# Altium PCB XBee_module.PcbDoc
Units mm, origin at the board's own origin, x right, y up, seen from the top; angles counter-clockwise.
Board outline 38.5 x 46 mm, 4 copper layers (Component Side, GND, Power plane, Solder Side), stack 1.426 mm thick; 11 components, 20 nets, 80 pads, 26 vias.
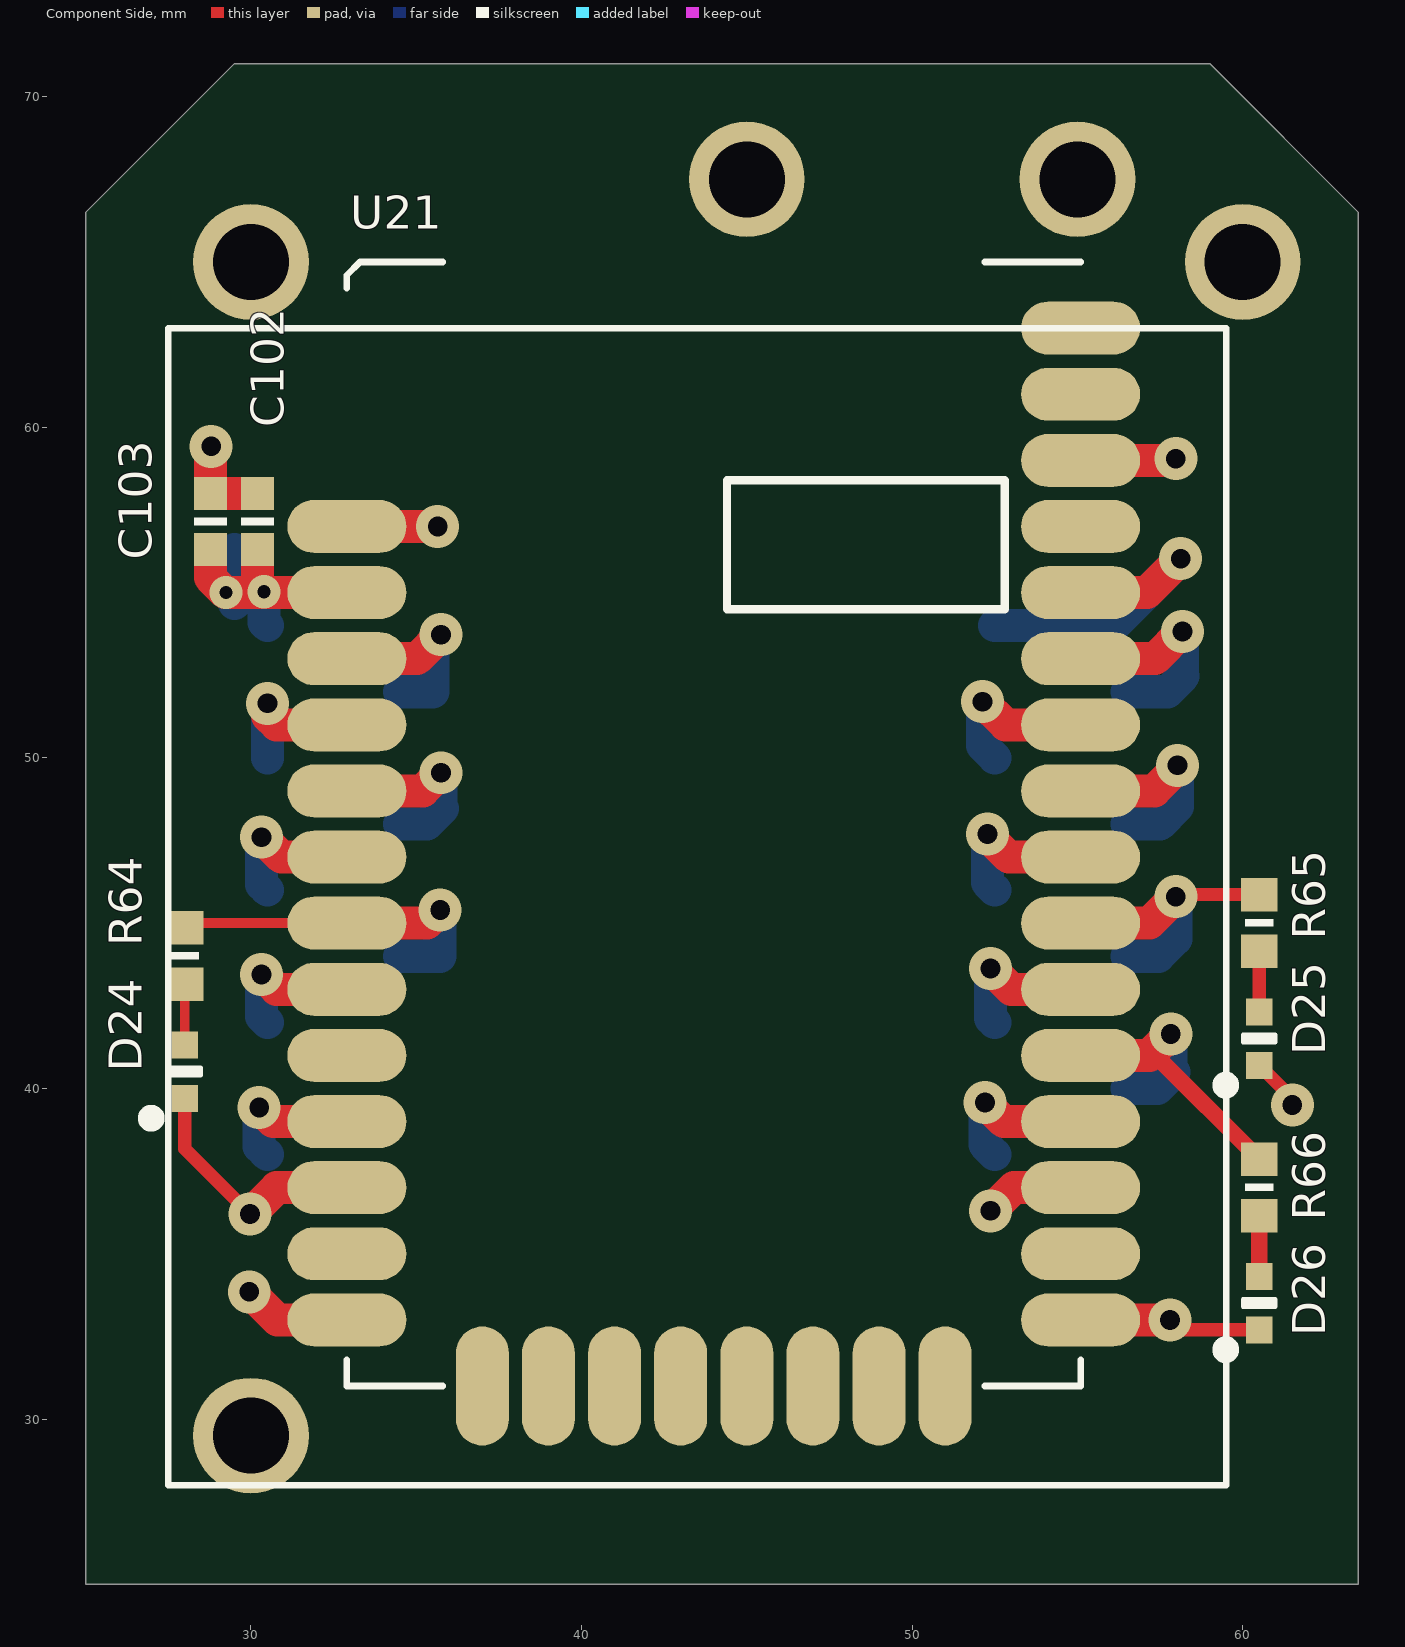
[diagram p0: Component Side view]
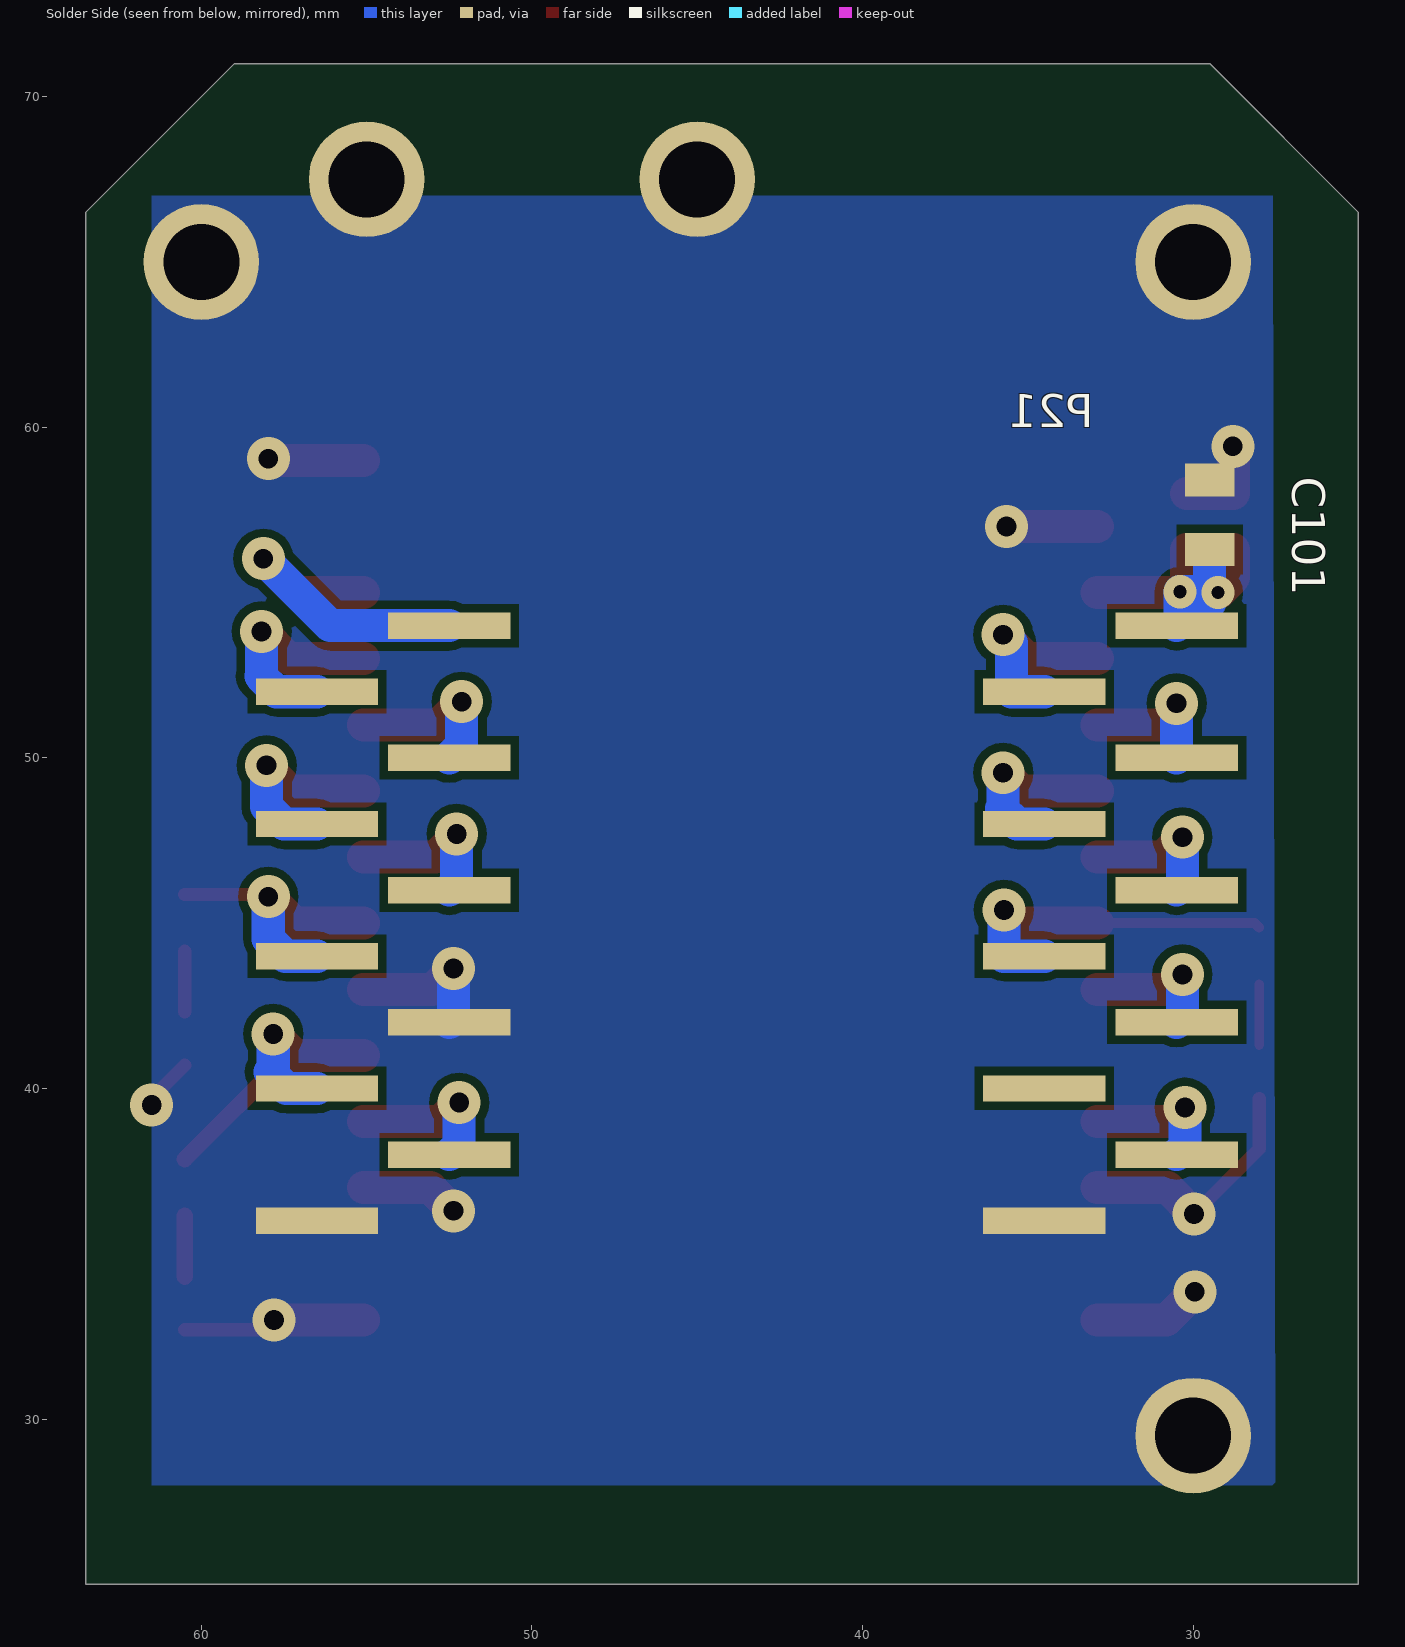
[diagram p1: Solder Side view, seen from below]

## Layer stack, top to bottom
Top Solder: solder mask 0.01, Solder Resist, Dk 3.5
Component Side: signal copper 0.035
Dielectric 1: prepreg 0.288, FR-4, Dk 4.5
GND: signal copper 0.035
Dielectric 4: core 0.71, FR-4, Dk 4.5
Power plane: signal copper 0.035
Dielectric 3: prepreg 0.288, FR-4, Dk 4.5
Solder Side: signal copper 0.035
Bottom Solder: solder mask 0.01, Solder Resist, Dk 3.5

## Board outline
25,25 63.5,25 63.5,66.5 59,71 29.5,71 25,66.5

## Design rules (kind name [scope] priority, off if disabled: settings)
Clearance [All] p1: gap=0.25
HoleSize [All] p1: absolutevalues=TRUE maxlimit=2.54 minlimit=0.3 maxpercent=80.000 minpercent=20.000
MinimumAnnularRing [All] p1: minimumring=0.3
PlaneConnect [All] p1: planeconnectstyle=Direct reliefexpansion=0.508 reliefentries=4 reliefconductorwidth=0.254 reliefairgap=0.254
PolygonConnect [All] p1: connectstyle=Direct reliefconductorwidth=0.254 reliefentries=4 polygonreliefangle="90 Angle" airgapwidth=0.254
RoutingVias [All] p1: holewidth=0.5 width=1 viastyle="Through Hole" minholewidth=0.3 minwidth=0.7 maxholewidth=0.711 maxwidth=1.27
SolderMaskExpansion [All] p1: expansion=0.102
Width [All] p1: maxlimit=10 minlimit=0.25 preferedwidth=1
28 further rules are at their usual default settings.

## Components (designator, comment, footprint, x,y, rotation, side; value= is the part's Value field where it differs from the comment)
C101 "10uF" CAP0805W 29.5,57.35 r270 bottom
C102 "220nF" CAP0603R 30.2,57.15 r270 top
C103 "47pF" CAP0603R 28.775,57.15 r270 top
D24 "LED" WL-SMCW 28,40.5 r90 top
D25 "LED" WL-SMCW 60.5,41.5 r90 top
D26 "LED" WL-SMCW 60.5,33.5 r90 top
P21 "XBee pin" "XBEE PIN" 43.5,45 r0 top
R64 "10" 0603 28,44 r90 top
R65 "10" 0603 60.5,45 r90 top
R66 "10" 0603 60.5,37 r90 top
U21 "XBee 868LP RF Module" "XBEE 868LP RF MODULE" 44,48 r0 top

## Footprints (in the part's own frame and the unit in brackets; to place one, negate y for a bottom-side part, rotate by r counter-clockwise, add the part's x,y. Pads: shape width x height; smd on the part's side, far side on the other; paste and mask are expansions set on the pad)
0603 [mil]
  rect 40x44 smd: 1(-33.46,0) 2(34,0)
  silkscreen extent -4,-17 5,17, body extent -33,-16 33,16, height 22
CAP0603R [mm] "capacitor 0603 reflow soldering"
  rect 1x1 smd: 1(-0.85,0) 2(0.85,0)
  silkscreen extent -0.13,-0.5 0.13,0.5, body extent -0.8,-0.4 0.8,0.4, height 0.3
CAP0805W [mm] "capacitor 0805 wave soldering"
  rect 1x1.5 smd: 1(-1.05,0) 2(1.05,0)
  body extent -1,-0.63 1,0.63, height 0.78
WL-SMCW [mil]
  rect 32x32 smd: A(32,0) C(-31.5,0)
  silkscreen extent -63,-19 5,48, body extent -31,-16 31,16, height 28
"XBEE 868LP RF MODULE" [mm]
  oval 3.6x1.6 smd: 1(-11.1,9) 2(-11.1,7) 3(-11.1,5) 4(-11.1,3) 5(-11.1,1) 6(-11.1,-1) 7(-11.1,-3) 8(-11.1,-5) 9(-11.1,-7) 10(-11.1,-9) 11(-11.1,-11) 12(-11.1,-13) 13(-11.1,-15) 22(11.1,-15) 23(11.1,-13) 24(11.1,-11) 25(11.1,-9) 26(11.1,-7) 27(11.1,-5) 28(11.1,-3) 29(11.1,-1) 30(11.1,1) 31(11.1,3) 32(11.1,5) 33(11.1,7) 34(11.1,9) 35(11.1,11) 36(11.1,13) 37(11.1,15)
  oval 1.6x3.6 smd: 14(-7,-17) 15(-5,-17) 16(-3,-17) 17(-1,-17) 18(1,-17) 19(3,-17) 20(5,-17) 21(7,-17)
  silkscreen extent -11.1,-17 11.1,17, body extent -11,-17 11,16.78, height 3.06
"XBEE PIN" [mm]
  rect 3.7x0.8 smd far side: 1(-13,9) 2(-9,7) 3(-13,5) 4(-9,3) 5(-13,1) 6(-9,-1) 7(-13,-3) 8(-9,-5) 9(-13,-7) 10(-9,-9) 11(13,-9) 12(9,-7) 13(13,-5) 14(9,-3) 15(13,-1) 16(9,1) 17(13,3) 18(9,5) 19(13,7) 20(9,9)
  silkscreen extent -16,-17 16,18, body extent -13,-10 13,10, height 6.6

## Part data
C101: library part C_10uF_16v, "Capacitor"
C102: library part C_220nF, "Capacitor"
C103: library part C_47pF_25V, "Capacitor"
D24 D25 D26: library part LED_SMD_GREEN_0603, "Standard LEDs - SMD WL-SMCW Waterclr 0603 Green"
R64 R65 R66: library part R_0603_025W_10Ohm, "0.25W 10Ohm"

## Free pads (board coordinates)
  round 3.5 hole 2.3: 2(30,29.5) 2(30,65) 2(45,67.5) 2(55,67.5) 2(60,65)

## Via types
v1: diameter 1.3, hole 0.6, Component Side to Solder Side, 24 vias
v2: diameter 1, hole 0.4, Component Side to Solder Side, 2 vias

## Nets (pads, with @x,y where several pads share a name; then routed paths per layer and width w, separated by ;. In a path a pad name is that pad's centre, name@x,y a point inside that pad or via, vN(x,y) a via of type N, cw(c..) or ccw(c..) an arc to the next point about the centre after c; other vN are vias at no path point)
GND: C101.1 C102.1 C103.1 D24.C D25.C D26.C P21.10 P21.11 P21.14 pad.2 U21.1 U21.11 U21.13 U21.22 U21.24 U21.27 U21.35 | length 34.2
  Component Side w0.4: D24.C 28,38.175 v1(29.975,36.2) ; v1(57.8,33) 58.1,32.7 D26.C ; D25.C 61.5,39.7 v1(61.5,39.5)
  Component Side w1: v1(28.8,59.425) 28.775,59.4 C103.1 C102.1 ; v1(29.95,33.85) 30.8,33 U21.13 ; v1(29.975,36.2) 30.775,37 U21.11 ; U21.1 v1(35.65,57) ; v1(52.375,36.3) 53.075,37 U21.24 ; v1(52.375,43.625) 53,43 U21.27 ; U21.22 v1(57.8,33) ; U21.35 57.925,59 v1(57.975,59.05)
  Solder Side w1: v1(52.375,43.625) 52.375,42.125 P21.14
NetC101_2: C101.2 C102.2 C103.2 P21.1 U21.2 | length 10
  Component Side w1: C103.2 28.775,55.45 29.225,55 U21.2 ; v2@30.2,55.15 C102.2
  Solder Side w1: C101.2 29.5,55 29.5,54.675 29.85,55.025 v2(30.4,55.025) 30.4,54.1 P21.1
  other v2: 29.25,55
NetD24_A: D24.A R64.1 | length 1.8
  Component Side w0.3: D24.A R64.1
NetD25_A: D25.A R65.1 | length 1.8
  Component Side w0.4: D25.A R65.1
NetD26_A: D26.A R66.1 | length 1.8
  Component Side w0.5: D26.A R66.1
NetP21_2: P21.2 U21.3 | length 6
  Component Side w1: U21.3 35.025,53 v1(35.75,53.725)
  Solder Side w1: P21.2 35.5,52 35.5,53.475 v1(35.75,53.725)
NetP21_3: P21.3 U21.4 | length 4.5
  Component Side w1: v1(30.5,51.65) 30.5,51.275 30.775,51 U21.4
  Solder Side w1: P21.3 v1(30.5,51.65)
NetP21_4: P21.4 U21.5 | length 5.7
  Component Side w1: U21.5 35.2,49 v1(35.75,49.55)
  Solder Side w1: P21.4 35.325,48 35.8,48.475 35.75,48.525 v1(35.75,49.55)
NetP21_5: P21.5 U21.6 | length 4.5
  Component Side w1: v1(30.325,47.6) 30.925,47 U21.6
  Solder Side w1: v1(30.325,47.6) 30.325,46.175 P21.5
NetP21_6: P21.6 R64.2 U21.7 | length 10.6
  Component Side w0.3: R64.2 28.136,45 U21.7
  Component Side w1: U21.7 35.325,45 v1(35.725,45.4)
  Solder Side w1: P21.6 35.725,44 v1(35.725,45.4)
NetP21_7: P21.7 U21.8 | length 4.3
  Component Side w1: v1(30.325,43.45) 30.775,43 U21.8
  Solder Side w1: v1(30.325,43.45) 30.325,42.175 P21.7
NetP21_9: P21.9 U21.10 | length 4.4
  Component Side w1: v1(30.25,39.425) 30.675,39 U21.10
  Solder Side w1: v1(30.25,39.425) 30.25,38.25 P21.9
NetP21_12: P21.12 U21.25 | length 4.8
  Component Side w1: v1(52.2,39.575) 52.775,39 U21.25
  Solder Side w1: v1(52.2,39.575) 52.2,38.3 P21.12
NetP21_13: P21.13 R66.2 U21.26 | length 10.4
  Component Side w0.5: 57.175,41 57.364,41 R66.2
  Component Side w1: U21.26 57.175,41 v1(57.825,41.65)
  Solder Side w1: P21.13 57.425,40 57.925,40.5 57.825,40.6 v1(57.825,41.65)
NetP21_15: P21.15 R65.2 U21.28 | length 8.7
  Component Side w0.4: v1(57.975,45.8) 58.039,45.864 R65.2
  Component Side w1: U21.28 57.175,45 v1(57.975,45.8)
  Solder Side w1: P21.15 57.45,44 57.975,44.525 v1(57.975,45.8)
NetP21_16: P21.16 U21.29 | length 4.9
  Component Side w1: v1(52.275,47.7) 52.275,47.65 52.925,47 U21.29
  Solder Side w1: v1(52.275,47.7) 52.275,46.225 P21.16
NetP21_17: P21.17 U21.30 | length 6.3
  Component Side w1: U21.30 57.325,49 58.05,49.725 58.025,49.75 v1(58.025,49.775)
  Solder Side w1: P21.17 57.5,48 58.025,48.525 v1(58.025,49.775)
NetP21_18: P21.18 U21.31 | length 5.1
  Component Side w1: v1(52.125,51.7) 52.825,51 U21.31
  Solder Side w1: v1(52.125,51.7) 52.125,50.375 P21.18
NetP21_19: P21.19 U21.32 | length 6.7
  Component Side w1: U21.32 57.35,53 v1(58.175,53.825)
  Solder Side w1: P21.19 57.725,52 58.2,52.475 58.175,52.5 v1(58.175,53.825)
NetP21_20: P21.20 U21.33 | length 9.9
  Component Side w1: U21.33 57.1,55 v1(58.125,56.025)
  Solder Side w1: P21.20 56.1,54 v1(58.125,56.025)
pads on no net: P21.8 U21.9 U21.12 U21.14 U21.15 U21.16 U21.17 U21.18 U21.19 U21.20 U21.21 U21.23 U21.34 U21.36 U21.37

## Polygon pours and split planes (outlines as drawn)
GND on Solder Side "GND plane" (solid, pour order 0): 27.596,67 61.5,67 61.5,28 27.522,28

## Silkscreen, mask and mechanical layers (free items; w line width, h text height)
Mechanical 3:
  the board outline again, w0.5

## Dimensions
25,25 to 63.5,25 on Mechanical 4
25,25 to 29.5,71 on Mechanical 4